# Allegro board A7LITE-ES0-allegro-mech.brd
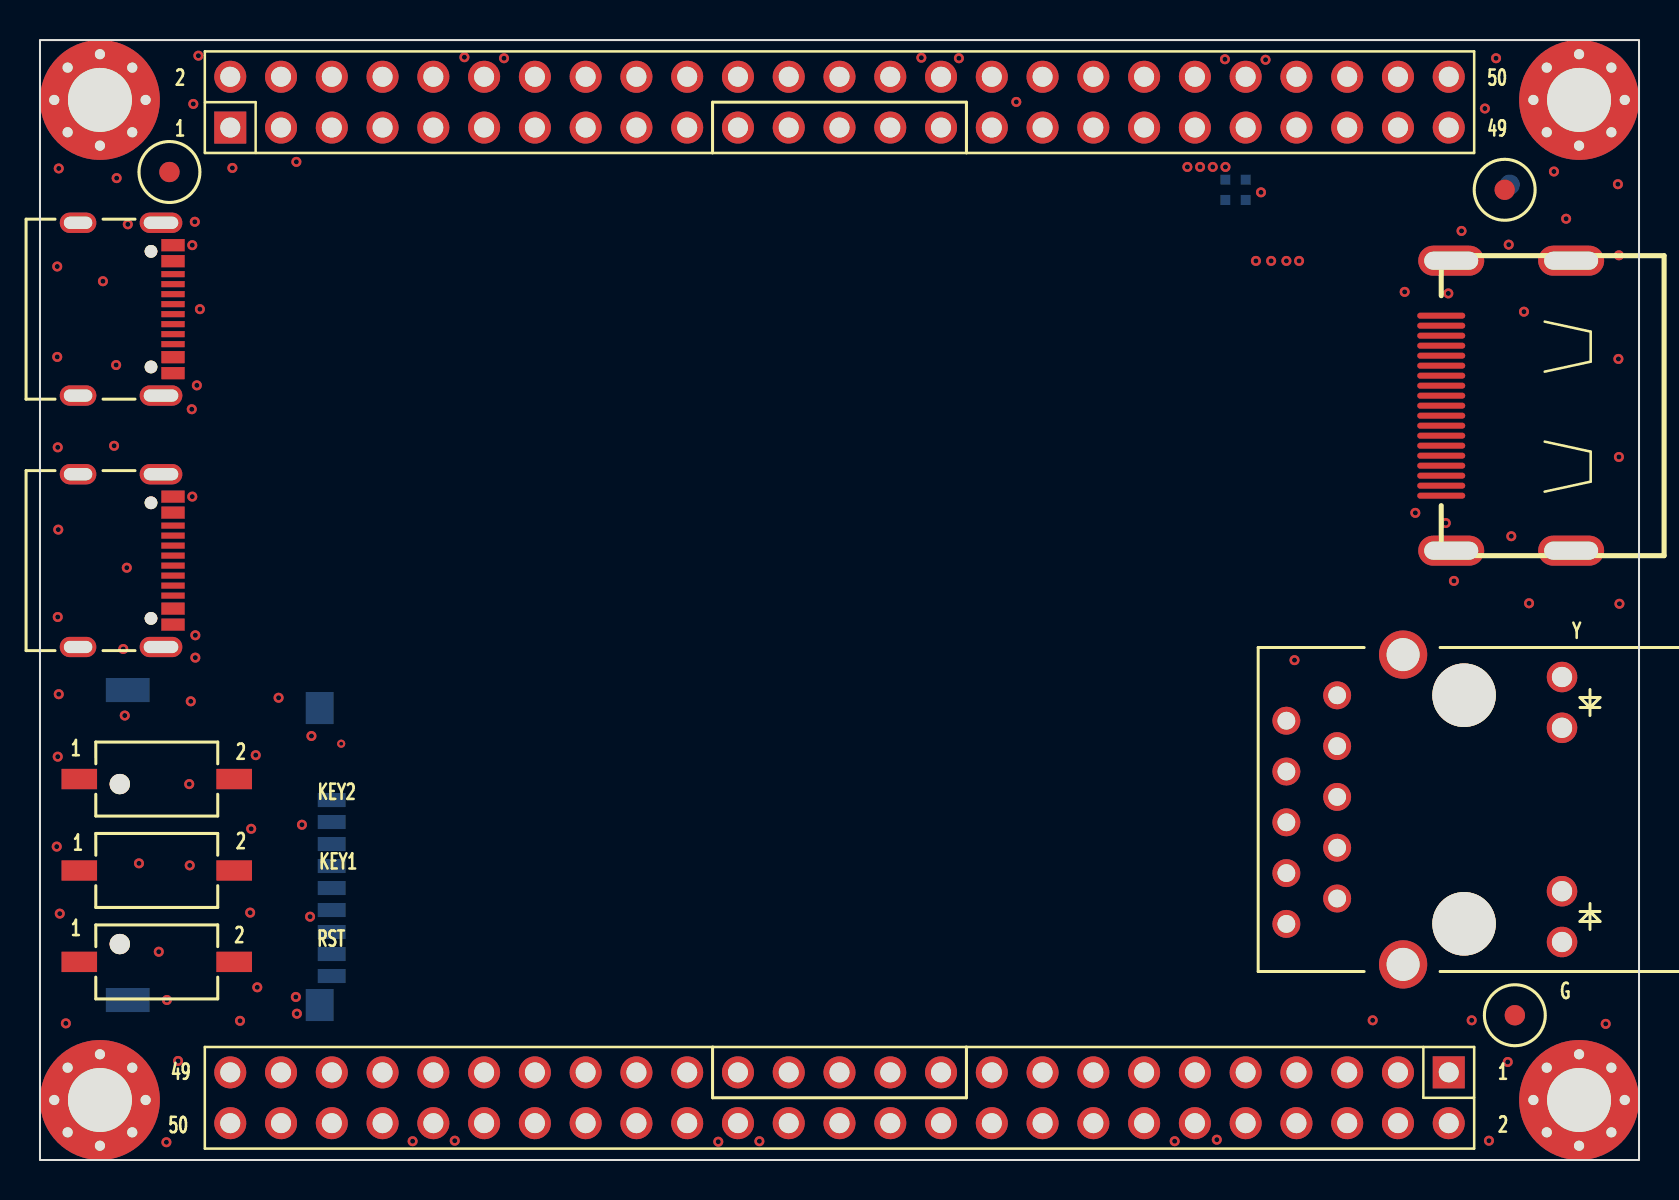
[diagram p0: board, top side]
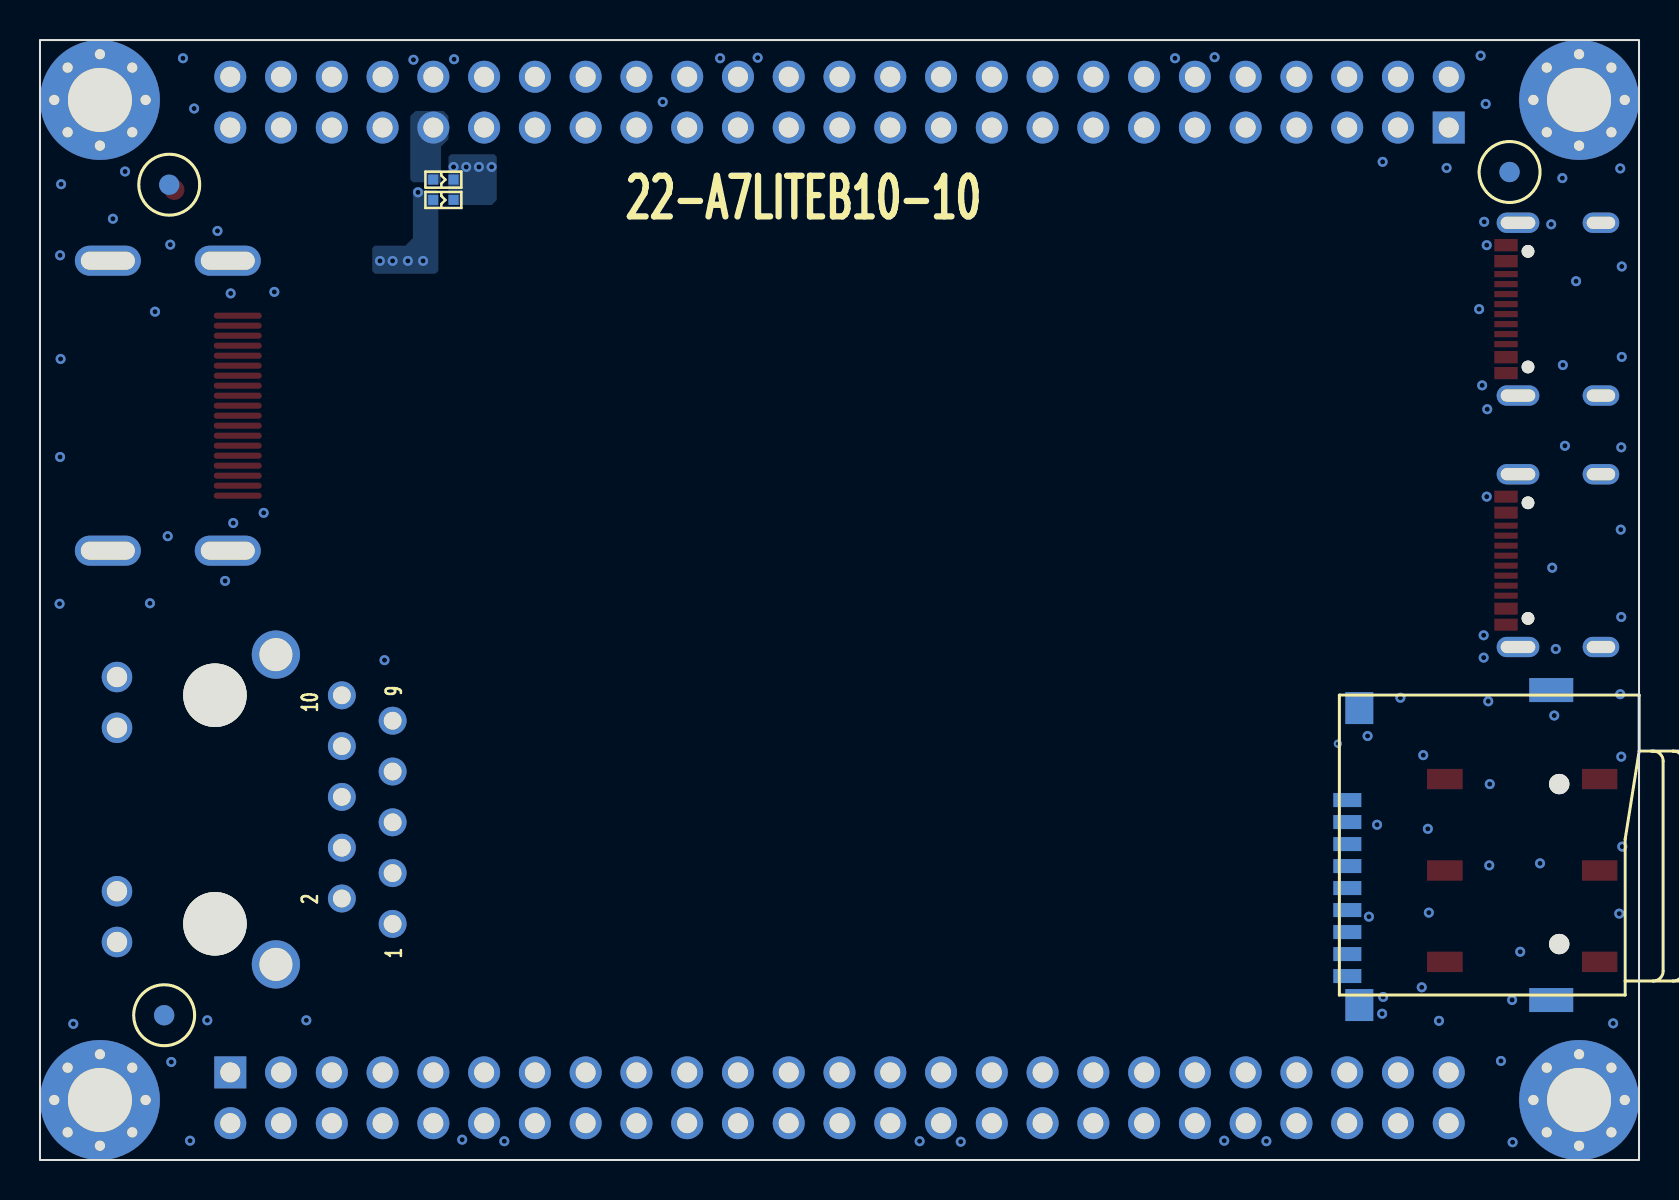
[diagram p1: board, bottom side, seen from below]

Outline 80 x 56 mm; copper layers: TOP, BOTTOM. Coordinates in mm from the lower left corner of the outline.
Outline path: rectangle 0,0 80,56 ; 0,56 0,0 80,0 80,56 0,56

## Design rules (mm)
net group DP1: nets USB2JTAG_DM USB2JTAG_DP
net group DP2: nets USB2UART_DM USB2UART_DP
net group ETH_MDI0_: nets ETH_MDI0_N ETH_MDI0_P
net group ETH_MDI1_: nets ETH_MDI1_N ETH_MDI1_P
net group ETH_MDI2_: nets ETH_MDI2_N ETH_MDI2_P
net group ETH_MDI3_: nets ETH_MDI3_N ETH_MDI3_P
net group HDMI1_HPD_CON: nets HDMI1_HPD_CON N18862367
net group HDMI1_I2C_SCL_LS: nets HDMI1_I2C_SCL_LS VCC_HDMI1_5V
net group HDMI1_I2C_SDA: nets HDMI1_I2C_SDA N18862592
net group KEY2: nets KEY2 N18839395
net group MG2_DDR3_DATA8-15: nets DDR3_DQS_N1 DDR3_DQS_P1
net group N18993821: nets N18993821 N18993841
net group 0GND: nets GND
net group 0PWR: nets PG_1V0 PG_1V5 PG_1V8 VCC_1V0 VCC_1V8 VCC_5V VCC_DDR3 VCC_PHY_1V0 VCC_PHY_3V3 VCC_USB2JTAG_3V3 VCC_USB2JTAG_5V VCC_USB2UART_5V VREF_DDR3
net group DDR3_ADDRES: nets DDR3_NCS
net group DDR3_DATA8-15: nets DDR3_D8 DDR3_D9 DDR3_D10 DDR3_D11 DDR3_D12 DDR3_D13 DDR3_D14 DDR3_D15 DDR3_DM1
net group ETH_RX: nets ETH_RXD2
net group ETH_TX: nets ETH_TXCK ETH_TXCTL ETH_TXD0 ETH_TXD1 ETH_TXD2 ETH_TXD3
net group MG1_DDR3_DATA0-7: nets DDR3_D0 DDR3_D1 DDR3_D2 DDR3_D3 DDR3_D4 DDR3_D5 DDR3_D6 DDR3_D7 DDR3_DM0 DDR3_DQS_N0 DDR3_DQS_P0
net group MG3_DDR3_ADRESS: nets DDR3_A0 DDR3_A1 DDR3_A2 DDR3_A3 DDR3_A4 DDR3_A5 DDR3_A6 DDR3_A7 DDR3_A8 DDR3_A9 DDR3_A10 DDR3_A11 DDR3_A12 DDR3_A13 DDR3_A14 DDR3_BA0 DDR3_BA1 DDR3_BA2 DDR3_CKE DDR3_NCAS DDR3_NRAS DDR3_NWE DDR3_ODT
net group MG8_GPIO1: nets GPIO1_0N GPIO1_0P GPIO1_1N GPIO1_1P GPIO1_2N GPIO1_2P GPIO1_3N GPIO1_3P GPIO1_4N GPIO1_4P GPIO1_5N GPIO1_5P GPIO1_6N GPIO1_6P GPIO1_7N GPIO1_7P GPIO1_8N GPIO1_8P GPIO1_9N GPIO1_9P GPIO1_10N GPIO1_10P GPIO1_11N GPIO1_11P GPIO1_12N GPIO1_12P GPIO1_13N GPIO1_13P GPIO1_14N GPIO1_14P GPIO1_15N GPIO1_15P GPIO1_16N GPIO1_16P GPIO1_17N GPIO1_17P GPIO1_18N GPIO1_18P GPIO1_19N GPIO1_19P GPIO1_20N GPIO1_20P GPIO1_21N GPIO1_21P
net group MG9_GPIO2: nets GPIO2_0N GPIO2_0P GPIO2_1N GPIO2_1P GPIO2_2N GPIO2_2P GPIO2_3N GPIO2_3P GPIO2_4N GPIO2_4P GPIO2_5N GPIO2_6N GPIO2_6P GPIO2_7N GPIO2_7P GPIO2_8N GPIO2_8P GPIO2_9N GPIO2_9P GPIO2_10N GPIO2_10P GPIO2_11N GPIO2_11P GPIO2_12N GPIO2_12P GPIO2_13N GPIO2_13P GPIO2_14N GPIO2_14P GPIO2_15N GPIO2_15P GPIO2_16N GPIO2_16P GPIO2_17N GPIO2_17P GPIO2_18N GPIO2_18P GPIO2_19N GPIO2_19P GPIO2_20N GPIO2_20P

## Placement (name value [footprint] x y rotation side)
B8  BLM15AX601SN1D  [0402L]  59.82 48.01 0 bottom
B9  BLM15AX601SN1D(NC)  [0402L]  59.82 49.02 0 bottom
J3  USB_TYPEC_16P  [TYPEC_16P]  1.91 29.97 270 top
J4  MicroSD  [TF-15-15B]  7.49 15.75 90 bottom
J5  HDMI  [HDMI19S]  70.1 37.72 90 top
J6  USB_TYPEC_16P  [TYPEC_16P]  1.91 42.55 270 top
J9  HR911130A  [RJ45_HR911130A]  71.25 17.53 270 top
J10  CON50A  [SIP50-2P54-2X25]  40 52.9 0 top
J11  CON50A  [SIP50-2P54-2X25]  40 3.11 180 top
K1  SW_2P  [SW2_3X6]  5.84 14.48 0 top
K2  SW_2P  [SW2_3X6]  5.84 19.05 0 top
K3  SW_2P  [SW2_3X6]  5.84 9.91 0 top
M1  Hole  [HOLE32CIR60]  3 53.01 0 top
M2  Hole  [HOLE32CIR60]  77 53.01 0 top
M3  Hole  [HOLE32CIR60]  3 3 0 top
M4  Hole  [HOLE32CIR60]  77 3 0 top
NOREF  -  [unnamed]  73.79 7.24 0 top
NOREF#2  -  [unnamed]  6.48 49.4 0 top
NOREF#3  -  [unnamed]  73.28 48.51 0 top
NOREF#4  -  [#2]  0 0 0 top
NOREF#5  -  [#2]  77 3 90 top
NOREF#6  -  [#2]  0 0 90 top
NOREF#7  -  [#2]  3 53.01 0 top
NOREF#8  -  [unnamed]  6.48 49.4 180 bottom
NOREF#9  -  [unnamed]  73.53 48.77 180 bottom
NOREF#10  -  [unnamed]  73.79 7.24 180 bottom

## Library data of the parts
B8 B9 = BEAD: room: 12 GPIO Connector_EEPROM
J3 = USB_TYPEC_16P: User Part Number: *; Tolerance: *; room: 09 KEY LED USB-UART SD
J4 = MicroSD_1: room: 09 KEY LED USB-UART SD
J5 = HDMI: room: 11 HDMI-TX
J6 = USB_TYPEC_16P: User Part Number: *; Tolerance: *; room: 13 USB-JTAG
J9 = RJ45_HR911130A: User Part Number: *; Tolerance: *; room: 10 ETH
J10 J11 = CON50A: room: 12 GPIO Connector_EEPROM
K1-K3 = SW_2P: room: 09 KEY LED USB-UART SD
M1-M4 = TP_R: room: 13 USB-JTAG

## Footprints (pads in the part's own frame, mm; a bottom-side part is the same pattern mirrored in y, then rotated)
0402L
  rect 0.5x0.5 smd: 1(-0.508,0) 2(0.508,0)
HDMI19S
  oval 0.3x2.4 smd: 1(4.5,0) 2(4,0) 3(3.5,0) 4(3,0) 5(2.5,0) 6(2,0) 7(1.5,0) 8(1,0) 9(0.5,0) 10(0,0) 11(-0.5,0) 12(-1,0) 13(-1.5,0) 14(-2,0) 15(-2.5,0) 16(-3,0) 17(-3.5,0) 18(-4,0) 19(-4.5,0)
  oval 1.5x3.3 hole 0.9x2.7: BO1(7.25,-0.5) BO2(-7.25,-0.5) BO3(7.25,-6.5) BO4(-7.25,-6.5)
HOLE32CIR60
  round 1.016 hole 0.508: (-2.286,0) (-1.616,1.616) (-1.616,-1.616) (0,2.286) (0,-2.286) (1.616,1.616) (1.616,-1.616) (2.286,0)
  round 5.994 hole 3.2: 1(0,0)
RJ45_HR911130A
  round 3.175 hole 3.175 unplated: (-5.715,0) (5.715,0)
  round 1.397 hole 0.889: 1(5.72,-8.89) 2(4.45,-6.35) 3(3.18,-8.89) 4(1.91,-6.35) 5(0.64,-8.89) 6(-0.63,-6.35) 7(-1.9,-8.89) 8(-3.17,-6.35) 9(-4.44,-8.89) 10(-5.71,-6.35)
  round 1.524 hole 1.016: 11(6.625,4.9) 12(4.085,4.9) 13(-4.085,4.9) 14(-6.625,4.9)
  round 2.413 hole 1.651: 15(7.745,-3.05) 16(-7.745,-3.05)
SIP50-2P54-2X25
  rect 1.6x1.6 hole 1: 1(-30.48,-1.27)
  round 1.6 hole 1: 2(-30.48,1.27) 3(-27.94,-1.27) 4(-27.94,1.27) 5(-25.4,-1.27) 6(-25.4,1.27) 7(-22.86,-1.27) 8(-22.86,1.27) 9(-20.32,-1.27) 10(-20.32,1.27) 11(-17.78,-1.27) 12(-17.78,1.27) 13(-15.24,-1.27) 14(-15.24,1.27) 15(-12.7,-1.27) 16(-12.7,1.27) 17(-10.16,-1.27) 18(-10.16,1.27) 19(-7.62,-1.27) 20(-7.62,1.27) 21(-5.08,-1.27) 22(-5.08,1.27) 23(-2.54,-1.27) 24(-2.54,1.27) 25(0,-1.27) 26(0,1.27) 27(2.54,-1.27) 28(2.54,1.27) 29(5.08,-1.27) 30(5.08,1.27) 31(7.62,-1.27) 32(7.62,1.27) 33(10.16,-1.27) 34(10.16,1.27) 35(12.7,-1.27) 36(12.7,1.27) 37(15.24,-1.27) 38(15.24,1.27) 39(17.78,-1.27) 40(17.78,1.27) 41(20.32,-1.27) 42(20.32,1.27) 43(22.86,-1.27) 44(22.86,1.27) 45(25.4,-1.27) 46(25.4,1.27) 47(27.94,-1.27) 48(27.94,1.27) 49(30.48,-1.27) 50(30.48,1.27)
SW2_3X6
  rect 1.778x1.016 smd: 1(-3.875,0) 2(3.875,0)
TF-15-15B
  round 1.016 hole 1.016 unplated: (-4.95,-3.5) (3.05,-3.5)
  rect 0.7x1.4 smd: 1(2.25,7.1) 2(1.15,7.1) 3(0.05,7.1) 4(-1.05,7.1) 5(-2.15,7.1) 6(-3.25,7.1) 7(-4.35,7.1) 8(-5.45,7.1) 9(-6.55,7.1)
  rect 1.6x1.4 smd: 10(-8,6.5) 11(6.85,6.5)
  rect 1.2x2.2 smd: 12(-7.75,-3.1) 13(7.75,-3.1)
TYPEC_16P
  round 0.635 hole 0.635 unplated: (-2.89,3.65) (2.89,3.65)
  rect 0.61x1.168 smd: A1B12(-3.2,4.75) A4B9(-2.4,4.75) B1A12(3.2,4.75) B4A9(2.4,4.75)
  rect 0.305x1.168 smd: A5(-1.25,4.75) A6(-0.25,4.75) A7(0.25,4.75) A8(-1.75,4.75) B5(1.75,4.75) B6(0.75,4.75) B7(-0.75,4.75) B8(1.25,4.75)
  oval 1.016x2.134 hole 0.61x1.727: G1(-4.32,4.15) G2(4.32,4.15)
  oval 1.016x1.829 hole 0.61x1.422: G3(-4.32,0) G4(4.32,0)
unnamed
  round 1.016 smd: 1(0,0)

## Nets
GND: J3.A1B12(GND#A1B12) J3.B1A12(GND#B1A12) J3.G1(S1) J3.G2(S2) J3.G3(S3) J3.G4(S4) J4.6(VSS#6) J4.10(VSS#10) J4.11(VSS#11) J4.12(VSS#12) J4.13(VSS#13) J5.2(D2S) J5.5(D1S) J5.8(D0S) J5.11(CLKS) J5.17(DCC/CECG) J5.BO1 J5.BO2 J5.BO3 J5.BO4 J6.A1B12(GND#A1B12) J6.B1A12(GND#B1A12) J6.G1(S1) J6.G2(S2) J6.G3(S3) J6.G4(S4) J9.12(LED_G-) J10.12 J10.30 J10.42 J11.12 J11.30 J11.42 K1.1 K2.1 K3.1 M1.1 M2.1 M3.1 M4.1
VCC_3V3: B8.2 J4.4(VCC) J10.29 J11.29
VCC_5V: J10.11 J11.11
VCC_HDMI1_5V: J5.18(5V0)
VCC_USB2JTAG_5V: J6.A4B9(VBUS#A4B9) J6.B4A9(VBUS#B4A9)
VCC_USB2UART_5V: J3.A4B9(VBUS#A4B9) J3.B4A9(VBUS#B4A9)
VCCIO_A: B9.2 J10.41
VCCIO_B16: B8.1 B9.1
ETH_MDI0_N: J9.3(MDI0-)
ETH_MDI0_P: J9.2(MDI0+)
ETH_MDI1_N: J9.7(MDI1-)
ETH_MDI1_P: J9.4(MDI1+)
ETH_MDI2_N: J9.6(MDI2-)
ETH_MDI2_P: J9.5(MDI2+)
ETH_MDI3_N: J9.9(MDI3-)
ETH_MDI3_P: J9.8(MDI3+)
GPIO1_0N: J10.2
GPIO1_0P: J10.1
GPIO1_1N: J10.4
GPIO1_1P: J10.3
GPIO1_2N: J10.6
GPIO1_2P: J10.5
GPIO1_3N: J10.8
GPIO1_3P: J10.7
GPIO1_4N: J10.10
GPIO1_4P: J10.9
GPIO1_5N: J10.14
GPIO1_5P: J10.13
GPIO1_6N: J10.16
GPIO1_6P: J10.15
GPIO1_7N: J10.18
GPIO1_7P: J10.17
GPIO1_8N: J10.20
GPIO1_8P: J10.19
GPIO1_9N: J10.22
GPIO1_9P: J10.21
GPIO1_10N: J10.24
GPIO1_10P: J10.23
GPIO1_11N: J10.26
GPIO1_11P: J10.25
GPIO1_12N: J10.28
GPIO1_12P: J10.27
GPIO1_13N: J10.32
GPIO1_13P: J10.31
GPIO1_14N: J10.34
GPIO1_14P: J10.33
GPIO1_15N: J10.36
GPIO1_15P: J10.35
GPIO1_16N: J10.38
GPIO1_16P: J10.37
GPIO1_17N: J10.40
GPIO1_17P: J10.39
GPIO1_18N: J10.44
GPIO1_18P: J10.43
GPIO1_19N: J10.46
GPIO1_19P: J10.45
GPIO1_20N: J10.48
GPIO1_20P: J10.47
GPIO1_21N: J10.50
GPIO1_21P: J10.49
GPIO2_0N: J11.2
GPIO2_0P: J11.1
GPIO2_1N: J11.4
GPIO2_1P: J11.3
GPIO2_2N: J11.6
GPIO2_2P: J11.5
GPIO2_3N: J11.8
GPIO2_3P: J11.7
GPIO2_4N: J11.10
GPIO2_4P: J11.9
GPIO2_5N: J11.14
GPIO2_5P: J11.13
GPIO2_6N: J11.16
GPIO2_6P: J11.15
GPIO2_7N: J11.18
GPIO2_7P: J11.17
GPIO2_8N: J11.20
GPIO2_8P: J11.19
GPIO2_9N: J11.22
GPIO2_9P: J11.21
GPIO2_10N: J11.24
GPIO2_10P: J11.23
GPIO2_11N: J11.26
GPIO2_11P: J11.25
GPIO2_12N: J11.28
GPIO2_12P: J11.27
GPIO2_13N: J11.32
GPIO2_13P: J11.31
GPIO2_14N: J11.34
GPIO2_14P: J11.33
GPIO2_15N: J11.36
GPIO2_15P: J11.35
GPIO2_16N: J11.38
GPIO2_16P: J11.37
GPIO2_17N: J11.40
GPIO2_17P: J11.39
GPIO2_18N: J11.44
GPIO2_18P: J11.43
GPIO2_19N: J11.46
GPIO2_19P: J11.45
GPIO2_20N: J11.48
GPIO2_20P: J11.47
GPIO2_21N: J11.50
GPIO2_21P: J11.49
HDMI1_CLK_N: J5.12(CLK-)
HDMI1_CLK_P: J5.10(CLK+)
HDMI1_D0_N: J5.9(D0-)
HDMI1_D0_P: J5.7(D0+)
HDMI1_D1_N: J5.6(D1-)
HDMI1_D1_P: J5.4(D1+)
HDMI1_D2_N: J5.3(D2-)
HDMI1_D2_P: J5.1(D2+)
HDMI1_HPD_CON: J5.19(HPD)
HDMI1_I2C_SCL_LS: J5.15(SCL)
HDMI1_I2C_SDA_LS: J5.16(SDA)
PHY_LED0: J9.13(LED_Y-)
SD_CLK: J4.5(CLK)
SD_CMD: J4.3(CMD)
SD_DATA0: J4.7(DAT0)
SD_DATA1: J4.8(DAT1)
SD_DATA2: J4.1(DAT2)
SD_DATA3: J4.2(DAT3)
USB2JTAG_DM: J6.A7(DN1) J6.B7(DN2)
USB2JTAG_DP: J6.A6(DP1) J6.B6(DP2)
USB2UART_DM: J3.A7(DN1) J3.B7(DN2)
USB2UART_DP: J3.A6(DP1) J3.B6(DP2)
N18829589: J6.B5(CC2)
N18829599: J6.A5(CC1)
N18839395: K2.2
N18839516: K1.2
N18840012: J4.9(CD)
N18840475: J3.B5(CC2)
N18840477: J3.A5(CC1)
N18845172: J9.11(LED_G+)
N18845174: J9.14(LED_Y+)
N18845176: J9.10(PGND) J9.15(SHIELD1) J9.16(SHIELD2)
N18845224: J9.1(CT)
N18862430: J5.13(CEC)
N18882280: K3.2

Pads without a net: J3 A8 B8; J5 14; J6 A8 B8; J11 41; NOREF 1; NOREF#2 1; NOREF#3 1; NOREF#8 1; NOREF#9 1; NOREF#10 1

## Via types
v1: diameter 0.5, hole 0.254, TOP to BOTTOM, 97 vias
v2: diameter 0.406, hole 0.203, TOP to BOTTOM, 1 via

## Routing (per net, layer and track width the routed paths; a pad name or vN(x,y) marks a point on that pad's centre or on a via; arc(x,y) is an arc through that point)
GND:
  vias: v1(0.84,15.67) v1(0.94,49.58) v1(0.86,44.68) v1(0.86,40.16) v1(0.89,35.64) v1(0.91,31.52) v1(0.89,27.15) v1(0.94,23.29) v1(0.89,20.17) v1(0.99,12.32) v1(1.3,6.83) v1(3.15,43.94) v1(3.71,35.71) v1(3.84,49.1) v1(3.81,39.75) v1(4.17,25.55) v1(4.24,22.23) v1(4.34,29.62) v1(4.39,46.79) v1(4.95,14.83) v1(5.94,10.41) v1(6.35,8) v1(6.32,0.89) v1(6.91,4.95) v1(7.54,22.94) v1(7.47,18.8) v1(7.49,14.73) v1(7.62,45.74) v1(7.59,37.54) v1(7.62,33.17) v1(7.67,52.81) v1(7.75,46.91) v1(7.85,38.73) v1(7.77,26.24) v1(7.77,25.12) v1(7.92,55.22) v1(8,42.55) v1(9.63,49.61) v1(10.01,6.96) v1(10.52,12.37) v1(10.57,16.56) v1(10.79,20.24) v1(10.87,8.64) v1(11.94,23.11) v1(12.83,49.91) v1(12.8,8.15) v1(12.85,7.32) v1(13.11,16.76) v1(13.51,12.17) v1(13.58,21.2) v1(18.64,0.94) v1(20.75,0.97) v1(21.23,55.14) v1(23.22,55.09) v1(33.93,0.91) v1(35.99,0.94) v1(44.09,55.12) v1(45.97,55.09) v1(48.84,52.91) v1(56.77,0.94) v1(58.88,1.02) v1(59.28,55.04) v1(61.32,55.02) v1(62.76,24.99) v1(66.67,6.99) v1(68.28,43.41) v1(68.81,32.36) v1(70.33,31.85) v1(70.46,43.33) v1(70.74,28.96) v1(71.12,46.46) v1(71.63,6.99) v1(72.29,52.58) v1(72.49,0.97) v1(72.85,55.09) v1(73.43,4.9) v1(73.48,45.77) v1(73.61,31.19) v1(74.24,42.42) v1(74.5,27.84) v1(75.74,49.43) v1(76.35,47.07) v1(78.33,6.81) v1(78.94,48.79) v1(78.99,45.24) v1(78.97,40.06) v1(78.99,35.15) v1(79.02,27.81) v2(15.07,20.82)
VCC_3V3:
  vias: v1(60.83,44.96) v1(61.09,48.39) v1(61.59,44.96) v1(62.36,44.96) v1(62.99,44.96)
VCCIO_B16:
  vias: v1(57.4,49.66) v1(58.04,49.66) v1(58.67,49.66) v1(59.31,49.66)

## Copper pours and planes (outline as drawn; the poured copper is in the pictures)
VCC_3V3 on BOTTOM: 61.34,46.1 61.72,45.72 63.25,45.72 63.37,45.59 63.37,44.45 63.25,44.32 60.2,44.32 60.07,44.45 60.07,48.39 60.2,48.51 60.83,48.51 60.96,48.64 61.21,48.64 61.34,48.51
VCCIO_A on BOTTOM: 60.83,48.9 61.34,48.9 61.47,49.02 61.47,52.2 61.21,52.45 59.82,52.45 59.56,52.2 59.56,51.05 59.94,50.67 59.94,48.9 60.07,48.77 60.71,48.77
VCCIO_B16 on BOTTOM: 59.44,50.29 59.56,50.16 59.56,47.88 59.44,47.75 57.4,47.75 57.15,48.01 57.15,50.16 57.28,50.29

## Text on the board
Ref Des/Silkscreen Bottom: 22-A7LITEB10-10
Ref Des/Silkscreen Top: RST | KEY2 | KEY1
DIMENSION: L3 | L1 | L1,L6 | L6 | 4.0/7.0/4.0 | 4.0/8.0/4.0 | 5 | 50 | 100 | +/-10% | L2,L5 | L2 | A | B | C | D | E | F | 1 | 2 | 3 | 4 | 6
User.16: FIGURE | SIZE | 8.0 | 10.0 | 20.0 | 35.0 | 39.37 | 40.0 | 65.0 | 126.0 | 25.0 | 125.0 | 56.0x24.0 | 68.0x24.0 | 106.3x35.43 | DRILL CHART: TOP to BOTTOM | ALL UNITS ARE IN MILS | TOLERANCE | +0.0/-0.0 | +3.0/-3.0 | +2.0/-2.0 | PLATED | NON-PLATED | QTY | 438 | 399 | 32 | 10 | 100 | 4 | 2
